# Altium PCB SpaceDisplayButtonBoard_PCB.PcbDoc
Units mm, origin at the board's own origin, x right, y up, seen from the top; angles counter-clockwise.
Board outline 38.1 x 80 mm, 2 copper layers (Top Layer, Bottom Layer); 38 components, 26 nets, 130 pads, 83 vias.
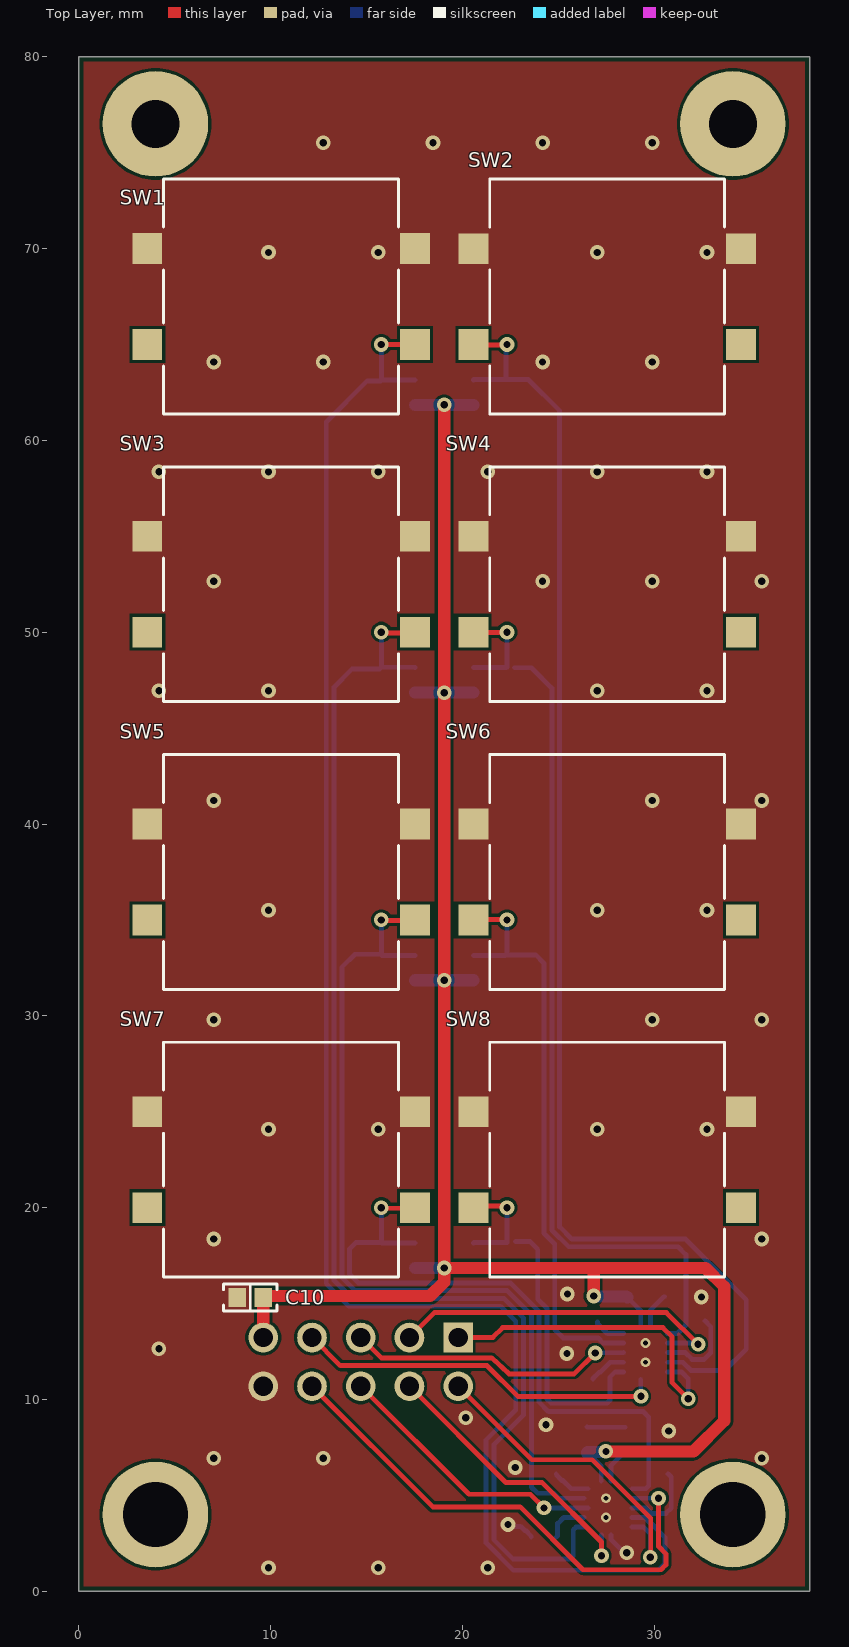
[diagram p0: Top Layer view]
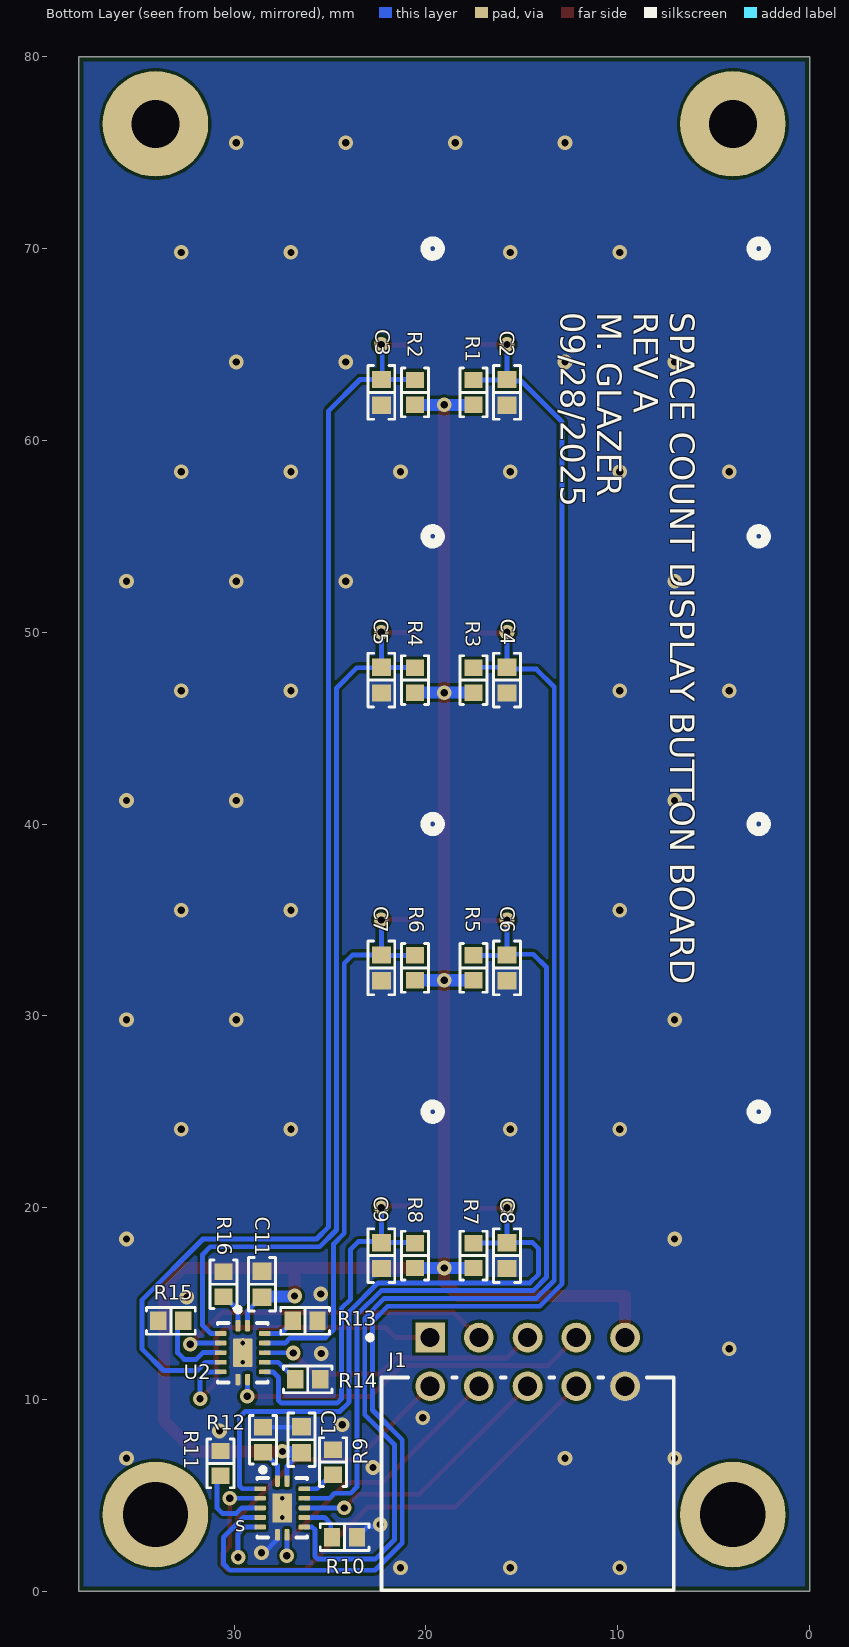
[diagram p1: Bottom Layer view, seen from below]
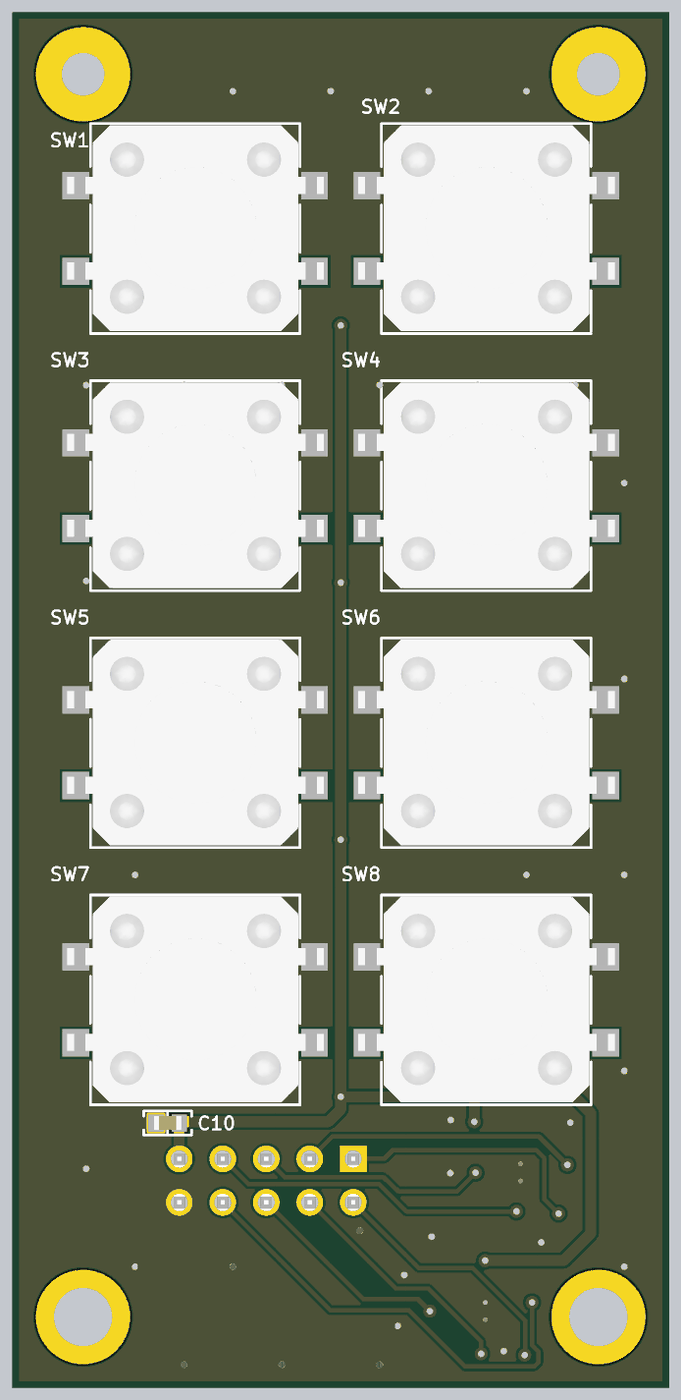
[diagram p2: 3D render of the assembled board from above, using the file's embedded part models]
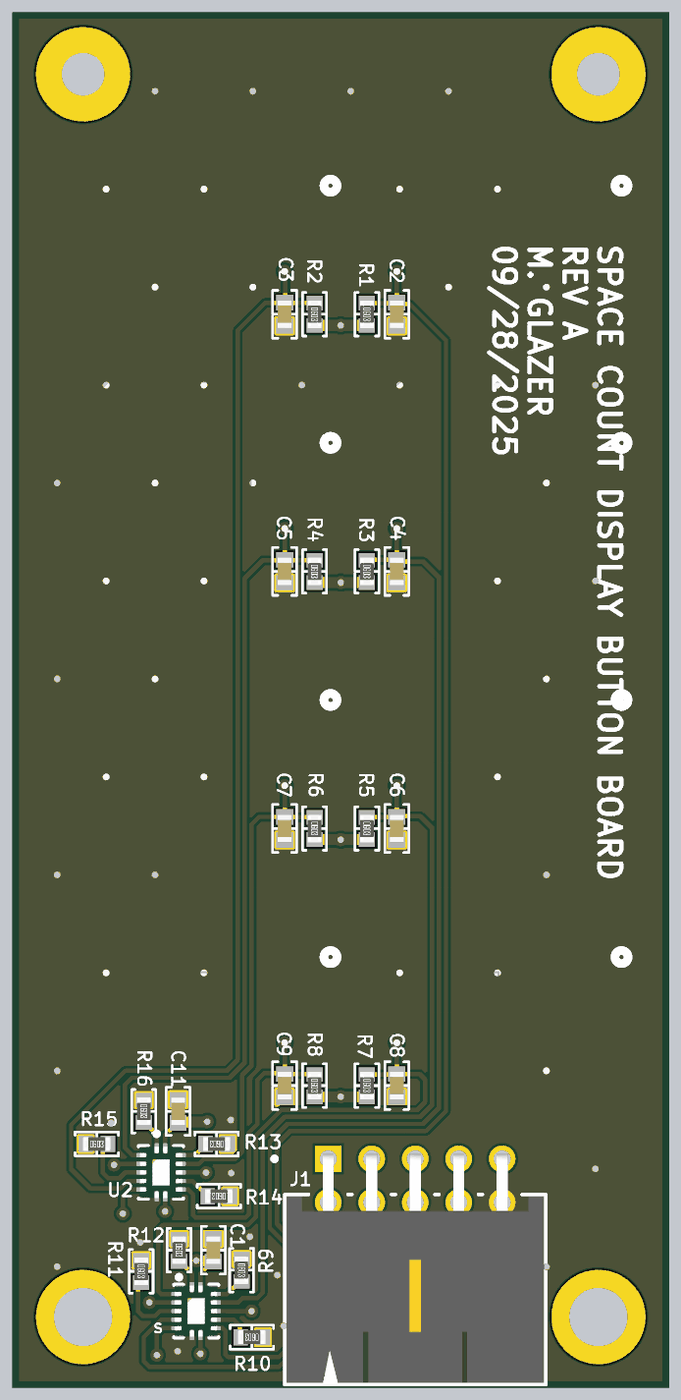
[diagram p3: 3D render of the assembled board from below, using the file's embedded part models]

## Layer stack, top to bottom
Top Solder: solder mask 0.0102, Solder Resist, Dk 3.5
Top Layer: signal copper 0.0356
Dielectric 1: dielectric 0.32, FR-4, Dk 4.8
Bottom Layer: signal copper 0.0356
Bottom Solder: solder mask 0.0102, Solder Resist, Dk 3.5

## Board outline
0,0 0,80 38.1,80 38.1,0

## Design rules (kind name [scope] priority, off if disabled: settings)
BoardOutlineClearance [All] p1: gap=0.254 ignorepadtopadclearanceinfootprint=FALSE
Clearance [All] p1: gap=0.152 ignorepadtopadclearanceinfootprint=FALSE
HoleSize [All] p1: absolutevalues=TRUE maxlimit=6.35 minlimit=0.254 maxpercent=80.000 minpercent=20.000
HoleToHoleClearance [All] p1: gap=0.127 allowstackedmicrovias=TRUE
MinimumAnnularRing [All] p1: minimumring=0.127
MinimumSolderMaskSliver [All] p1: minsoldermaskwidth=0.127
PolygonConnect [All] p1: connectstyle=Direct reliefconductorwidth=0.254 reliefentries=4 polygonreliefangle="90 Angle" airgapwidth=0.254
RoutingVias [All] p1: holewidth=0.381 width=0.762 viastyle="Through Hole" minholewidth=0.254 minwidth=0.508 maxholewidth=0.711 maxwidth=1.27
SilkToSilkClearance [All] p1: silktosilkclearance=0.127
SilkToSolderMaskClearance [IsPad] p1: minsilkscreentomaskgap=0.064 clearancetoexposedcopper=TRUE
SolderMaskExpansion [All] p1: expansion=0.102 istentingtop=FALSE
SupplyNets "Schematic Supply Nets_1" [InNet('+3V3')] p1: voltage=0.000
SupplyNets "Schematic Supply Nets" [InNet('GND')] p2: voltage=0.000
Width [All] p1: maxlimit=2.54 minlimit=0.203 preferedwidth=0.254
25 further rules are at their usual default settings.

## Components (designator, comment, footprint, x,y, rotation, side; value= is the part's Value field where it differs from the comment)
C1 "0.1 µF" "CAP 0603_1608" 26.493,7.899 r270 bottom
C2 "0.1 µF" "CAP 0603_1608" 15.775,62.5 r90 bottom
C3 "0.1 µF" "CAP 0603_1608" 22.325,62.5 r90 bottom
C4 "0.1 µF" "CAP 0603_1608" 15.775,47.5 r90 bottom
C5 "0.1 µF" "CAP 0603_1608" 22.325,47.5 r90 bottom
C6 "0.1 µF" "CAP 0603_1608" 15.775,32.5 r90 bottom
C7 "0.1 µF" "CAP 0603_1608" 22.325,32.5 r90 bottom
C8 "0.1 µF" "CAP 0603_1608" 15.775,17.5 r90 bottom
C9 "0.1 µF" "CAP 0603_1608" 22.325,17.5 r90 bottom
C10 "1 µF" "CAP 0603_1608" 8.941,15.316 r0 top
C11 "0.1 µF" "CAP 0603_1608" 28.55,16.002 r270 bottom
J1 "90130-3310" FP-90130-3310-MFG 14.7,5.6 r180 bottom
R1 "100 kOhms" "RES 0603_1608" 17.525,62.5 r270 bottom
R2 "100 kOhms" "RES 0603_1608" 20.575,62.5 r270 bottom
R3 "100 kOhms" "RES 0603_1608" 17.525,47.5 r270 bottom
R4 "100 kOhms" "RES 0603_1608" 20.575,47.5 r270 bottom
R5 "100 kOhms" "RES 0603_1608" 17.525,32.5 r270 bottom
R6 "100 kOhms" "RES 0603_1608" 20.575,32.5 r270 bottom
R7 "100 kOhms" "RES 0603_1608" 17.525,17.5 r270 bottom
R8 "100 kOhms" "RES 0603_1608" 20.575,17.5 r270 bottom
R9 "10 kOhms" "RES 0603_1608" 24.841,6.731 r270 bottom
R10 "10 kOhms" "RES 0603_1608" 24.243,2.819 r0 bottom
R11 "10 kOhms" "RES 0603_1608" 30.709,6.665 r270 bottom
R12 "10 kOhms" "RES 0603_1608" 28.493,7.899 r270 bottom
R13 "10 kOhms" "RES 0603_1608" 26.3,14.097 r0 bottom
R14 "10 kOhms" "RES 0603_1608" 26.162,11.049 r0 bottom
R15 "10 kOhms" "RES 0603_1608" 33.3,14.097 r180 bottom
R16 "10 kOhms" "RES 0603_1608" 30.55,16.002 r270 bottom
s "SN74HCS125BQAR" FP-BQA0014A-MFG#1 27.493,4.346 r180 bottom (schematic designator U1)
SW1 "TL3300CF160Q" SW_TL3300CF160Q_EWI 10.55,67.5 r0 top
SW2 "TL3300CF160Q" SW_TL3300CF160Q_EWI 27.55,67.499 r0 top
SW3 "TL3300CF160Q" SW_TL3300CF160Q_EWI 10.55,52.5 r0 top
SW4 "TL3300CF160Q" SW_TL3300CF160Q_EWI 27.55,52.5 r0 top
SW5 "TL3300CF160Q" SW_TL3300CF160Q_EWI 10.55,37.5 r0 top
SW6 "TL3300CF160Q" SW_TL3300CF160Q_EWI 27.55,37.5 r0 top
SW7 "TL3300CF160Q" SW_TL3300CF160Q_EWI 10.55,22.5 r0 top
SW8 "TL3300CF160Q" SW_TL3300CF160Q_EWI 27.55,22.5 r0 top
U2 "SN74HCS125BQAR" FP-BQA0014A-MFG#2 29.55,12.438 r180 bottom

## Footprints (in the part's own frame and the unit in brackets; to place one, negate y for a bottom-side part, rotate by r counter-clockwise, add the part's x,y. Pads: shape width x height; smd on the part's side, far side on the other; paste and mask are expansions set on the pad)
"CAP 0603_1608" [mm] "Chip Capacitor, 2-Leads, Body 1.60x0.80mm, IPC Medium Density"
  rect 0.9x1 smd: 1(-0.675,0) 2(0.675,0)
  silkscreen extent -1.4,-0.7 1.4,0.7, body extent -0.8,-0.41 0.8,0.41, height 0.82
FP-90130-3310-MFG [mm]
  rect 1.55x1.55 hole 1 paste-2539.97 mask+0: 1(-5.08,7.628)
  round 1.55 hole 1 paste-2539.97 mask+0: 2(-5.08,5.088) 3(-2.54,7.628) 4(-2.54,5.088) 5(0,7.628) 6(0,5.088) 7(2.54,7.628) 8(2.54,5.088) 9(5.08,7.628) 10(5.08,5.088)
  silkscreen extent -8.34,-5.55 7.62,7.75, body extent -7.52,-5.45 7.52,7.95, height 10.05
FP-BQA0014A-MFG#1 [mm]
  rrect40% 0.25x0.6 smd paste+0 mask+0: 1(-0.25,1.4) 7(-0.25,-1.4) 8(0.25,-1.4) 14(0.25,1.4)
  rrect40% 0.6x0.25 smd paste+0 mask+0: 2(-1.15,1) 3(-1.15,0.5) 4(-1.15,0) 5(-1.15,-0.5) 6(-1.15,-1) 9(1.15,-1) 10(1.15,-0.5) 11(1.15,0) 12(1.15,0.5) 13(1.15,1)
  rect 1x1.5 smd paste-1000 mask+0: 15(0,0)
  silkscreen extent -1.3,-1.55 1.3,2.1, body extent -1.25,-1.5 1.25,1.5, height 0.8
FP-BQA0014A-MFG#2 [mm]
  rrect40% 0.25x0.6 smd paste+0 mask+0: 1(-0.25,1.4) 7(-0.25,-1.4) 8(0.25,-1.4) 14(0.25,1.4)
  rrect40% 0.6x0.25 smd paste+0 mask+0: 2(-1.15,1) 3(-1.15,0.5) 4(-1.15,0) 5(-1.15,-0.5) 6(-1.15,-1) 9(1.15,-1) 10(1.15,-0.5) 11(1.15,0) 12(1.15,0.5) 13(1.15,1)
  rrect10% 1x1.5 smd paste-1000 mask+0: 15(0,0)
  silkscreen extent -1.3,-1.55 1.3,2.37, body extent -1.25,-1.5 1.25,1.5, height 0.8
"RES 0603_1608" [mm] "Chip Resistor, 2-Leads, Body 1.60x0.80mm, IPC Medium Density"
  rect 0.85x0.95 smd: 1(-0.65,0) 2(0.65,0)
  silkscreen extent -1.27,-0.7 1.27,0.7, body extent -0.8,-0.4 0.8,0.4, height 0.45
SW_TL3300CF160Q_EWI [mm]
  rect 1.549x1.6 smd paste+0 mask+0: 1(-6.975,2.5) 2(6.975,2.5) 3(-6.975,-2.5) 4(6.975,-2.5)
  silkscreen extent -6.12,-6.12 6.12,6.12, body extent -7.48,-5.98 7.52,6.02, height 8.8

## Part data
C1 C2 C3 C4 C5 C6 C7 C8 C9 C11: library part CL10B104KA8WPNC, "CAP CER 0.1UF 25V X7R 0603", Device Package="0603 (1608 Metric)", manufacturer="Samsung Electro-Mechanics", Operating Temperature="-55°C ~ 125°C", Ratings=AEC-Q200, Supplier Part Number 1=1276-6717-1-ND, Temperature Coefficient=X7R, Tolerance=±10%, Voltage - Rated=25V, Applications=Automotive, Capacitance="0.1 µF", componentlink1description=Datasheet, componentlink1url=http://www.samsungsem.com/kr/support/product-search/mlcc/CL10B104KA8WPNC.jsp, componentlink2description="DigiKey Link", componentlink2url=https://www.digikey.com/en/products/detail/samsung-electro-mechanics/CL10B104KA8WPNC/5961201, Features="Open Mode", lastupdated="2/9/2024 8:10:26 PM", Lifecycle Status=Active, Minimum Order=1, Mounting Type="Surface Mount, MLCC", Package / Case="0603 (1608 Metric)", packaging=TapeAndReel, Part Number=CL10B104KA8WPNC, Part Status=Active, partid=5631, price=0.01, series=CL, Size / Dimension="0.063\" L x 0.031\" W (1.60mm x 0.80mm)", Supplier 1=DigiKey, Thickness (Max)="0.035\" (0.90mm)"
C10: library part CL10A105KA8NNNC, "CAP CER 1UF 25V X5R 0603", Device Package="0603 (1608 Metric)", manufacturer="Samsung Electro-Mechanics", Operating Temperature="-55°C ~ 85°C", Supplier Part Number 1=1276-1102-1-ND, Temperature Coefficient=X5R, Tolerance=±10%, Voltage - Rated=25V, Applications="General Purpose", Capacitance="1 µF", componentlink1description=Datasheet, componentlink1url=http://www.samsungsem.com/kr/support/product-search/mlcc/CL10A105KA8NNNC.jsp, componentlink2description="DigiKey Link", componentlink2url=https://www.digikey.com/en/products/detail/samsung-electro-mechanics/CL10A105KA8NNNC/3886760, lastupdated="2/9/2024 8:10:26 PM", Lifecycle Status=Active, Minimum Order=1, Mounting Type="Surface Mount, MLCC", Package / Case="0603 (1608 Metric)", packaging=TapeAndReel, Part Number=CL10A105KA8NNNC, Part Status=Active, partid=5508, price=0.01, series=CL, Size / Dimension="0.063\" L x 0.031\" W (1.60mm x 0.80mm)", Supplier 1=DigiKey, Thickness (Max)="0.035\" (0.90mm)"
J1: library part CMP-00257-07135077-1, "90130-3310 Conn Shrouded Header (4 Sides) HDR 10 POS 2.54mm Solder RA Thru-Hole C-Grid III™ Frame", Color=Black, Current Rating=3A, Manufacturer Lifecycle Status=ACTIVE, Max Operating Temperature=125°C, Max Voltage Rating (DC)=350.35kV, Min Operating Temperature=-55°C, Voltage Rating=350V, Contact Material=Brass, Contact Plating=Gold, Country of Origin=SK, Glow Wire Compliant=Non-compliant, Height=10.05mm, Housing Material=Polyester, Lead Pitch=2.54mm, Lifecycle Status=Production, Mount="Through Hole", NexarPartId=7135077, Number of Circuits=8, Number of Contacts=10, Number of Positions=10, Number of Rows=2, Orientation="Right Angle", Pitch=2.54mm, Plating=Tin, RoHS=Compliant, Termination=Solder, Voltage Rating (AC)=350V, Voltage Rating (DC)=350V
R1 R2 R3 R4 R5 R6 R7 R8: library part RMCF0603FT100K, "RES 100K OHM 1% 1/10W 0603", Device Package="0603 (1608 Metric)", manufacturer="Stackpole Electronics Inc", Operating Temperature="-55°C ~ 155°C", Power (Watts)="0.1W, 1/10W", Ratings=AEC-Q200, Supplier Device Package=0603, Supplier Part Number 1=RMCF0603FT100KCT-ND, Temperature Coefficient=±100ppm/°C, Tolerance=±1%, componentlink1description=Datasheet, componentlink1url=https://www.seielect.com/catalog/sei-packaging.pdf, componentlink2description="DigiKey Link", componentlink2url=https://www.digikey.com/en/products/detail/stackpole-electronics-inc/RMCF0603FT100K/1761112, Composition="Thick Film", Features="Automotive AEC-Q200", Height - Seated (Max)="0.022\" (0.55mm)", lastupdated="2/9/2024 8:42:00 PM", Lifecycle Status=Active, Minimum Order=1, Number of Terminations=2, Package / Case="0603 (1608 Metric)", packaging=CutTape, Part Number=RMCF0603FT100K, Part Status=Active, partid=25664, price=0.01, Resistance="100 kOhms", series=RMCF, Size / Dimension="0.061\" L x 0.031\" W (1.55mm x 0.80mm)", Supplier 1=DigiKey
R9 R10 R11 R12 R13 R14 R15 R16: library part RMCF0603FT10K0, "RES 10K OHM 1% 1/10W 0603", Device Package="0603 (1608 Metric)", manufacturer="Stackpole Electronics Inc", Operating Temperature="-55°C ~ 155°C", Power (Watts)="0.1W, 1/10W", Ratings=AEC-Q200, Supplier Device Package=0603, Supplier Part Number 1=RMCF0603FT10K0CT-ND, Temperature Coefficient=±100ppm/°C, Tolerance=±1%, componentlink1description=Datasheet, componentlink1url=https://www.seielect.com/catalog/sei-rmcf_rmcp.pdf, componentlink2description="DigiKey Link", componentlink2url=https://www.digikey.com/en/products/detail/stackpole-electronics-inc/RMCF0603FT10K0/1761235, Composition="Thick Film", Features="Automotive AEC-Q200", Height - Seated (Max)="0.022\" (0.55mm)", lastupdated="2/9/2024 8:42:00 PM", Lifecycle Status=Active, Minimum Order=1, Number of Terminations=2, Package / Case="0603 (1608 Metric)", packaging=CutTape, Part Number=RMCF0603FT10K0, Part Status=Active, partid=25663, price=0.01, Resistance="10 kOhms", series=RMCF, Size / Dimension="0.061\" L x 0.031\" W (1.55mm x 0.80mm)", Supplier 1=DigiKey
s U2: library part CMP-04900-000043-1, "IC BUFFER NON-INVERT 6V 14WQFN"
SW1 SW2 SW3 SW4 SW5 SW6 SW7 SW8: "Description", Manufacturer_Name=E-Switch, Supplier Part Number 1=EG4904CT-ND, Copyright="Copyright (C) 2025 Ultra Librarian. All rights reserved.", Manufacturer_Part_Number=TL3300CF160Q, RefDes=RefDes, Supplier 1=Digikey, Type=Type

## Free pads (board coordinates)
  round 5.5 hole 3.4: 2(4,4) 2(34.1,4)
  round 5.5 hole 2.5: 2(4,76.5) 2(34.1,76.5)

## Via types
v1: diameter 0.762, hole 0.381, Top Layer to Bottom Layer, tented both sides, 79 vias
v2: diameter 0.508, hole 0.254, Top Layer to Bottom Layer, tented top, 4 vias

## Nets (pads, with @x,y where several pads share a name; then routed paths per layer and width w, separated by ;. In a path a pad name is that pad's centre, name@x,y a point inside that pad or via, vN(x,y) a via of type N, cw(c..) or ccw(c..) an arc to the next point about the centre after c; other vN are vias at no path point)
+3V3: C1.2 C10.2 C11.2 J1.9 R1.2 R2.2 R3.2 R4.2 R5.2 R6.2 R7.2 R8.2 s.14 U2.14 | length 106.3
  Top Layer w0.635: J1.9@9.616,13.228 C10.2 ; C10.2@9.616,15.392 18.316,15.392 19.051,16.127 v1(19.051,16.85) ; v1(19.051,61.85) v1(19.051,46.85) v1(19.051,31.85) v1(19.051,16.85) ; v1(26.848,15.392) 26.848,16.789 ; v1(27.483,7.29) 32.055,7.29 33.656,8.891 33.656,15.875 32.681,16.85 v1(19.051,16.85)
  Bottom Layer w0.254: C1.2@26.543,7.224 27.243,6.524 s.14 ; C11.2@28.6,15.327 29.3,14.627 U2.14
  Bottom Layer w0.635: R7.2 v1(19.051,16.85) R8.2 ; R5.2 v1(19.051,31.85) R6.2 ; R3.2 v1(19.051,46.85) R4.2 ; R1.2 v1(19.051,61.85) R2.2 ; C1.2 26.534,7.266 27.459,7.266 v1(27.483,7.29) ; v1(26.848,15.392) 26.873,15.368 28.559,15.368 C11.2@28.6,15.327
BUTTON1_IN: C2.2 R1.1 s.5 SW1.4 | length 90.5
  Top Layer w0.254: v1(15.775,65) SW1.4
  Bottom Layer w0.254: v1(15.775,65) C2.2@15.775,63.15 ; R1.1@17.527,63.15 C2.2@15.775,63.15 ; s.5@28.841,3.846 29.52,3.846 30.556,2.811 30.556,1.422 30.227,1.092 22.657,1.092 21.234,2.515 21.234,7.899 22.784,9.449 22.784,14.071 21.996,14.859 14.075,14.859 12.904,16.03 12.904,60.96 15.043,63.099 15.724,63.099 C2.2@15.775,63.15
BUTTON1_IN_EN: R11.2 s.4 | length 4.1
  Bottom Layer w0.254: s.4@28.841,4.346 29.595,4.346 29.883,4.058 30.611,4.058 30.887,4.335 30.887,5.954 R11.2@30.72,6.121
BUTTON1_OUT: J1.2 s.6 | length 17.2
  Top Layer w0.254: J1.2@19.787,10.693 23.622,6.858 26.772,6.858 29.82,3.81 29.82,1.804 v1(29.794,1.778)
  Bottom Layer w0.254: s.6@28.841,3.346 29.446,3.346 29.794,2.998 v1(29.794,1.778)
BUTTON2_IN: C3.2 R2.1 SW2.3 U2.5 | length 69.5
  Top Layer w0.254: SW2.3@20.984,65.06 21.071,64.973 v1@22.276,64.973
  Bottom Layer w0.254: R2.1 20.6,63.175 C3.2 ; v1@22.276,64.973 22.276,63.224 C3.2 ; U2.5 31.497,11.938 31.928,11.506 33.681,11.506 34.799,12.624 34.799,15.189 31.624,18.364 25.705,18.364 25.07,18.999 25.07,61.544 23.44,63.175 C3.2
  other v1: 22.325,65
BUTTON2_IN_EN: R15.2 U2.4 | length 4.3
  Bottom Layer w0.254: U2.4 31.632,12.438 31.979,12.09 32.608,12.09 32.948,12.43 32.948,13.799 R15.2
BUTTON2_OUT: J1.1 U2.6 | length 17.4
  Top Layer w0.254: J1.1@19.787,13.233 21.59,13.233 22.098,13.741 30.455,13.741 30.938,13.259 30.938,10.871 v1(31.776,10.033)
  Bottom Layer w0.254: U2.6 31.422,11.438 31.776,11.084 v1(31.776,10.033)
BUTTON3_IN: C4.2 R3.1 s.9 SW3.4 | length 68.6
  Top Layer w0.254: v1@15.774,50.013 15.774,49.987 15.749,49.962 17.487,49.962 SW3.4
  Bottom Layer w0.254: C4.2@15.685,48.071 14.239,48.071 13.31,47.142 13.31,16.199 14.244,15.265 22.165,15.265 23.191,14.239 23.191,9.195 21.641,7.645 21.641,2.683 22.647,1.676 25.633,1.676 25.782,1.825 25.782,3.198 25.93,3.346 s.9 ; v1(15.775,50) C4.2 17.5,48.175 R3.1
BUTTON3_IN_EN: R10.2 s.10 | length 2.2
  Bottom Layer w0.254: R10.2 24.965,2.892 24.965,3.527 25.285,3.846 s.10
BUTTON3_OUT: J1.4 s.8 | length 15.2
  Top Layer w0.254: J1.4@17.247,10.693 22.276,5.664 24.155,5.664 27.255,2.565 v1(27.255,1.854)
  Bottom Layer w0.254: s.8 27.245,2.944 27.245,1.864 v1(27.255,1.854)
BUTTON4_IN: C5.2 R4.1 SW4.3 U2.2 | length 48.3
  Top Layer w0.254: SW4.3 20.588,49.987 v1@22.302,49.987
  Bottom Layer w0.254: R4.1 22.3,48.15 C5.2 v1(22.325,50) ; C5.2@22.721,48.148 23.602,48.148 24.664,47.086 24.664,18.831 25.537,17.958 31.243,17.958 31.649,17.551 31.649,13.868 31.217,13.437 30.701,13.437 U2.2
BUTTON4_IN_EN: R16.2 U2.1 | length 1.9
  Bottom Layer w0.254: U2.1 29.8,14.652 30.5,15.352 R16.2
BUTTON4_OUT: J1.3 U2.3 | length 17.9
  Top Layer w0.254: J1.3@17.247,13.233 18.542,14.529 30.637,14.529 v1(32.288,12.878)
  Bottom Layer w0.254: U2.3 30.702,12.936 32.229,12.936 v1(32.288,12.878)
BUTTON5_IN: C6.2 R5.1 s.12 SW5.4 | length 46.3
  Top Layer w0.254: v1@15.825,34.976 17.501,34.976 SW5.4
  Bottom Layer w0.254: C6.2@15.634,33.212 14.401,33.212 13.717,32.528 13.717,16.367 14.412,15.672 22.333,15.672 23.597,14.408 23.597,5.435 23.927,5.105 24.766,5.105 25.025,4.846 s.12 ; v1(15.775,35) C6.2 15.8,33.15 R5.1
BUTTON5_IN_EN: R9.2 s.13 | length 2
  Bottom Layer w0.254: R9.2@24.893,6.121 24.893,6.071 25.191,5.773 25.241,5.773 25.668,5.346 s.13@26.541,5.346
BUTTON5_OUT: J1.6 s.11 | length 14.5
  Top Layer w0.254: J1.6@14.707,10.693 20.345,5.055 23.546,5.055 v1(24.258,4.343)
  Bottom Layer w0.254: v1(24.258,4.343) v1(24.258,4.343) 25.783,4.344 25.785,4.346 s.11@26.541,4.346
BUTTON6_IN: C7.2 R6.1 SW6.3 U2.12 | length 30.6
  Top Layer w0.254: SW6.3 20.602,35.027 v1@22.251,35.027
  Bottom Layer w0.254: R6.1 22.252,33.15 22.325,33.223 v1(22.325,35) ; C7.2 23.82,33.175 24.258,32.737 24.258,18.663 24.816,18.104 24.816,13.635 25.244,13.208 27.071,13.208 27.341,12.938 U2.12
BUTTON6_IN_EN: R13.2 U2.13 | length 1.6
  Bottom Layer w0.254: R13.2@27.053,14.032 27.053,13.944 27.559,13.438 U2.13
BUTTON6_OUT: J1.5 U2.11 | length 14.9
  Top Layer w0.254: J1.5@14.707,13.233 15.773,12.167 21.525,12.167 22.432,11.328 25.832,11.328 v1(26.924,12.421)
  Bottom Layer w0.254: v1(26.924,12.421) 26.939,12.436 28.398,12.436 U2.11
BUTTON7_IN: C8.2 R7.1 s.2 SW7.4 | length 34.5
  Top Layer w0.254: v1@15.723,19.964 17.489,19.964 SW7.4
  Bottom Layer w0.254: v1(15.775,20) C8.2 ; R7.1 15.8,18.15 C8.2 ; s.2@28.841,5.346 29.57,5.346 29.719,5.495 29.719,9.076 29.422,9.373 24.486,9.373 24.004,9.855 24.004,14.576 22.501,16.078 14.58,16.078 14.123,16.535 14.123,17.856 14.442,18.175 C8.2
BUTTON7_IN_EN: R12.2 s.1 | length 1.8
  Bottom Layer w0.254: s.1 27.743,6.549 28.443,7.249 R12.2
BUTTON7_OUT: J1.8 s.3 | length 27.5
  Top Layer w0.254: J1.8 18.454,4.394 23.012,4.394 26.289,1.118 30.353,1.118 30.607,1.372 30.607,1.956 30.227,2.336 v1(30.227,4.851)
  Bottom Layer w0.254: s.3@28.841,4.846 28.843,4.848 30.224,4.848 v1(30.227,4.851)
BUTTON8_IN: C9.2 R8.1 SW8.3 U2.9 | length 20.2
  Top Layer w0.254: SW8.3 20.666,20.091 v1@22.327,20.091
  Bottom Layer w0.254: R8.1 20.6,18.175 C9.2 v1(22.325,20) ; C9.2@22.772,18.226 23.532,18.226 23.927,17.831 23.927,15.227 24.41,14.744 24.41,10.023 24.629,9.804 27.538,9.804 27.687,9.953 27.687,11.149 27.974,11.436 28.398,11.436 U2.9
BUTTON8_IN_EN: R14.2 U2.10 | length 2
  Bottom Layer w0.254: R14.2 26.812,11.099 27.11,11.397 27.16,11.397 27.701,11.938 U2.10
BUTTON8_OUT: J1.7 U2.8 | length 19.3
  Top Layer w0.254: J1.7@12.167,13.233 13.64,11.76 21.285,11.76 22.885,10.16 v1(29.312,10.16)
  Bottom Layer w0.254: U2.8 29.302,11.036 29.302,10.17 v1(29.312,10.16)
GND: C1.1 C2.1 C3.1 C4.1 C5.1 C6.1 C7.1 C8.1 C9.1 C10.1 C11.1 J1.10 R9.1 R10.1 R11.1 R12.1 R13.1 R14.1 R15.1 R16.1 s.7 s.15 SW1.1 SW1.2 SW2.1 SW2.2 SW3.1 SW3.2 SW4.1 SW4.2 SW5.1 SW5.2 SW6.1 SW6.2 SW7.1 SW7.2 SW8.1 SW8.2 U2.7 U2.15 | length 4.9
  Bottom Layer w0.254: v1(22.378,3.48) 22.475,3.383 23.029,3.383 23.245,3.167 23.295,3.167 23.593,2.869 R10.1 ; C1.1 26.518,8.549 R12.1 ; s.7 27.743,2.702 28.438,2.007 v1(28.576,2.007)
  other v1: 9.894,1.219 15.609,1.219 21.324,1.219 22.759,6.452 7.036,6.934 12.751,6.934 35.611,6.934 30.76,8.357 24.359,8.687 20.168,9.042 25.451,12.395 4.179,12.649 32.462,15.342 25.477,15.494 7.036,18.364 35.611,18.364 9.894,24.079 15.609,24.079 27.039,24.079 32.754,24.079 7.036,29.794 29.896,29.794 35.611,29.794 9.894,35.509 27.039,35.509 32.754,35.509 7.036,41.224 29.896,41.224 35.611,41.224 4.179,46.939 9.894,46.939 27.039,46.939 32.754,46.939 7.036,52.654 24.181,52.654 29.896,52.654 35.611,52.654 4.179,58.369 9.894,58.369 15.609,58.369 21.324,58.369 27.039,58.369 32.754,58.369 7.036,64.084 12.751,64.084 24.181,64.084 29.896,64.084 9.894,69.799 15.609,69.799 27.039,69.799 32.754,69.799 12.751,75.514 18.466,75.514 24.181,75.514 29.896,75.514
  other v2: 27.493,3.846 27.493,4.846 29.55,11.938 29.55,12.938
pads on no net: SW1.3 SW2.4 SW3.3 SW4.4 SW5.3 SW6.4 SW7.3 SW8.4

## Polygon pours and split planes (outlines as drawn)
GND on Top Layer "GND_L01_P001" (solid, remove dead copper, pour order 2): 0,0 0,80 38.1,80 38.1,0
GND on Bottom Layer "GND_L02_P001" (solid, remove dead copper, pour order 3): 0,0 0,80 38.1,80 38.1,0

## Silkscreen, mask and mechanical layers (free items; w line width, h text height)
Bottom Overlay:
  text "SPACE COUNT DISPLAY BUTTON BOARD / REV A / M. GLAZER / 09/28/2025" at 12.98,66.675 h1.27 r90
Board:
  the board outline again, w0.254

## Text inside footprints (layer, text, board x,y; h text height)
SW1: Top 3D Body "RefDes2" at 8.328,66.865 h1.27
SW2: Top 3D Body "RefDes2" at 25.327,66.864 h1.27
SW3: Top 3D Body "RefDes2" at 8.328,51.865 h1.27
SW4: Top 3D Body "RefDes2" at 25.328,51.865 h1.27
SW5: Top 3D Body "RefDes2" at 8.328,36.865 h1.27
SW6: Top 3D Body "RefDes2" at 25.328,36.865 h1.27
SW7: Top 3D Body "RefDes2" at 8.328,21.865 h1.27
SW8: Top 3D Body "RefDes2" at 25.328,21.865 h1.27